# Altium PCB IRBeaconBlasterPCB.PcbDoc
Units mil, origin at the board's own origin, x right, y up, seen from the top; angles counter-clockwise.
Board outline 650 x 2125 mil, 2 copper layers (Top Layer, Bottom Layer); 15 components, 8 nets, 27 pads, 0 vias.
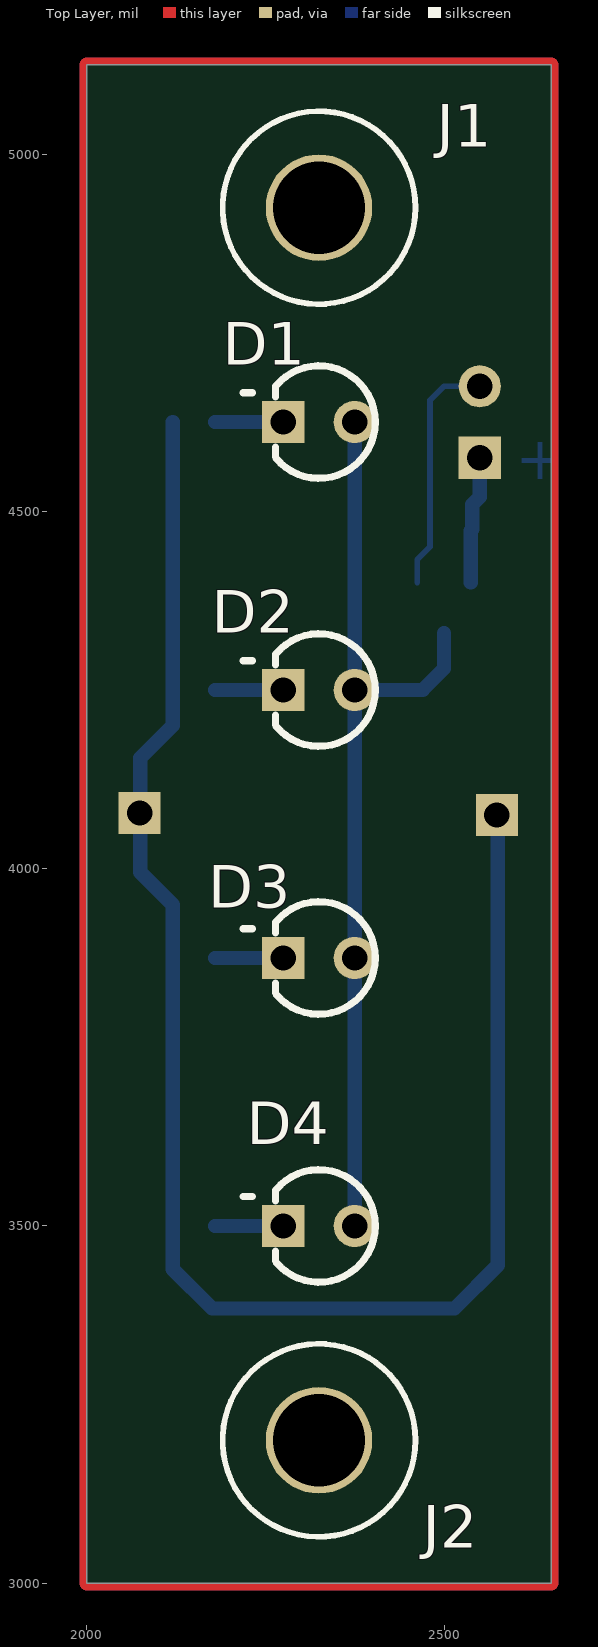
[diagram p0: Top Layer view]
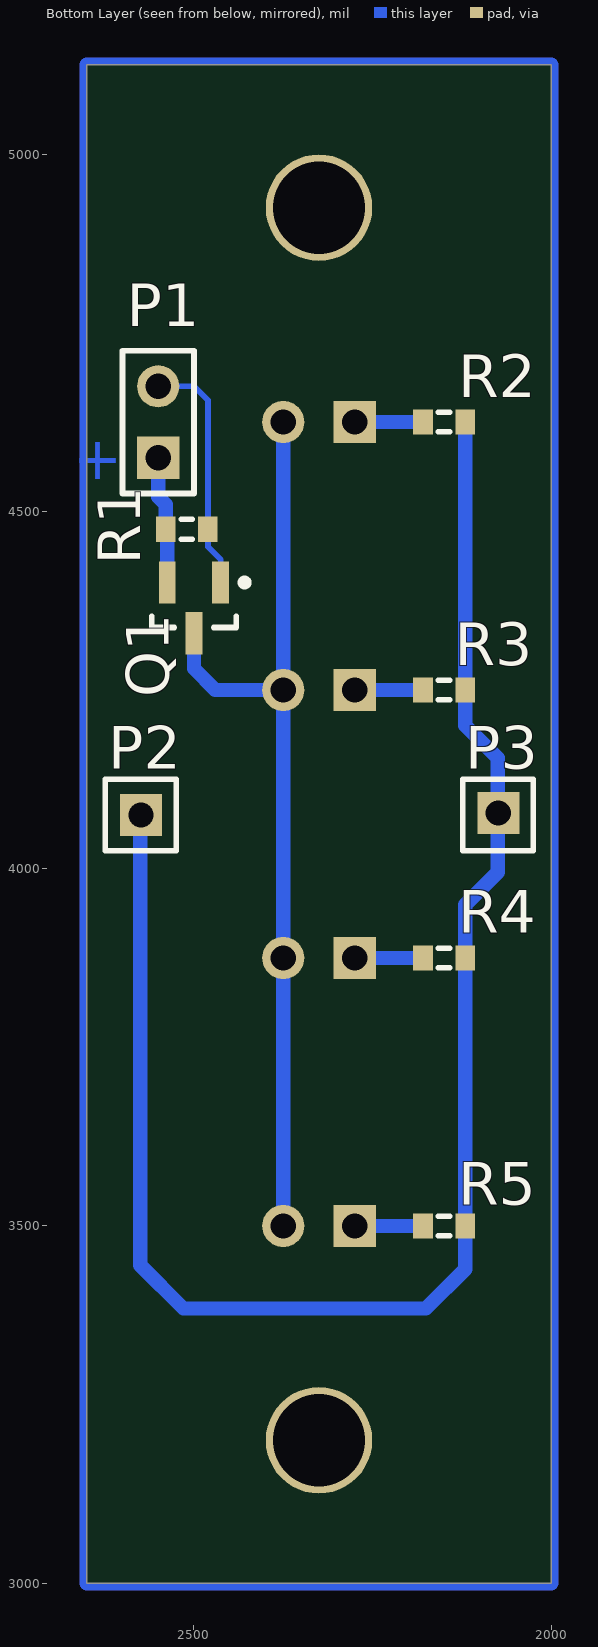
[diagram p1: Bottom Layer view, seen from below]

## Layer stack, top to bottom
Top Layer: signal copper 1.4
Dielectric: dielectric 12.6, FR-4, Dk 4.8
Bottom Layer: signal copper 1.4

## Board outline
2000,3000 2650,3000 2650,5125 2000,5125

## Design rules (kind name [scope] priority, off if disabled: settings)
Clearance [All] p1: gap=8
HoleSize [All] p1: absolutevalues=TRUE maxlimit=200 minlimit=20 maxpercent=80.000 minpercent=20.000
MinimumSolderMaskSliver [All] p1: minsoldermaskwidth=0
PolygonConnect [All] p1: connectstyle=Relief reliefconductorwidth=10 reliefentries=4 polygonreliefangle="90 Angle"
RoutingVias [All] p1: holewidth=20 width=30 viastyle="Through Hole" minholewidth=28 minwidth=50 maxholewidth=28 maxwidth=50
SilkToSilkClearance [All] p1: silktosilkclearance=0
SilkscreenOverComponentPads [All] p1: minsilkscreentomaskgap=-50
SolderMaskExpansion [All] p1: expansion=4
Width [All] p1: maxlimit=50 minlimit=8 preferedwidth=12 minimp=50.000000 maximp=50.000000 favimp=50.000000
24 further rules are at their usual default settings.

## Components (designator, comment, footprint, x,y, rotation, side; value= is the part's Value field where it differs from the comment)
D1 "IR LED" LED_PTH_3mm 2325,4625 r0 top
D2 "IR LED" LED_PTH_3mm 2325,4250 r0 top
D3 "IR LED" LED_PTH_3mm 2325,3875 r0 top
D4 "IR LED" LED_PTH_3mm 2325,3500 r0 top
J1 "#4" #4_Screw_Hole 2325,4925 r0 top
J2 "#4" #4_Screw_Hole 2325,3200 r0 top
P1 "Input_Header" HDR1X2 2550,4575 r90 bottom
P2 "GND_1" HDR1X1#1 2573.98,4075 r180 bottom
P3 "GND_2" HDR1X1#2 2073.98,4075 r180 bottom
Q1 "DMG2301U" SOT-23 2500,4365 r270 bottom
R1 "1K" J1-0603 2510,4475 r0 bottom
R2 "Res3" J1-0603 2150,4625 r0 bottom
R3 "Res3" J1-0603 2150,4250 r0 bottom
R4 "Res3" J1-0603 2150,3875 r0 bottom
R5 "Res3" J1-0603 2150,3500 r0 bottom

## Footprints (in the part's own frame and the unit in brackets; to place one, negate y for a bottom-side part, rotate by r counter-clockwise, add the part's x,y. Pads: shape width x height; smd on the part's side, far side on the other; paste and mask are expansions set on the pad)
#4_Screw_Hole [mil] "#4 Screw Hole, 3.2766mm Hole Dia., Plated"
  round 149 hole 129 unplated: 1(0,0)
  silkscreen extent -135,-135 135,135
HDR1X1#1 [mm] "Way of designating a single hole which is meant to have an electrical connection"
  rect 1.5x1.5 hole 0.9: 1(0,0)
  silkscreen extent -1.27,-1.27 1.24,1.27
HDR1X1#2 [mm] "Way of designating a single hole which is meant to have an electrical connection"
  rect 1.5x1.5 hole 0.9: 1(0,0.076)
  silkscreen extent -1.27,-1.27 1.24,1.27
HDR1X2 [mm] "Connector; Header; 2 Position"
  rect 1.5x1.5 hole 0.9: 1(0,0)
  round 1.5 hole 0.9: 2(2.54,0)
  silkscreen extent -1.27,-1.27 3.81,1.27
J1-0603 [mm] "Chip Resistor, Body 1.6x0.8mm, IPC High Density"
  rect 0.7x0.9 smd: 1(-0.75,0) 2(0.75,0)
  silkscreen extent -0.2,-0.35 0.2,0.35, body extent -0.85,-0.48 0.85,0.48, height 0.9
LED_PTH_3mm [mm] "Pin Though Hole 3mm LED with 0.1 Pitch Leads"
  round 1.5 hole 0.9: 1(1.27,0)
  rect 1.5x1.5 hole 0.9: 2(-1.27,0)
  silkscreen extent -2.69,-2 2,2
SOT-23 [mm] "SOT23, 3-Leads, Body 3.0x2.5mm (max), Pitch 0.95mm, IPC Medium Density"
  rect 1.5x0.6 smd: 1(-0.9,0.95) 2(-0.9,-0.95) 3(0.9,0)
  silkscreen extent -1.02,-1.5 0.7,1.92, body extent -0.7,-1.5 0.7,1.5, height 1.2

## Part data
D1 D2 D3 D4: library part LED
J1 J2: library part Mechanical_Hole, "A mechanical hole for mounting the board"
P1: library part "Header 2", "Header, 2-Pin"
P2 P3: library part "Header 1x1"
Q1: library part P-Mosfet
R1: library part Res3, "Resistor"
R2 R3 R4 R5: "Resistor"

## Nets (pads, with @x,y where several pads share a name; then routed paths per layer and width w, separated by ;. In a path a pad name is that pad's centre, name@x,y a point inside that pad or via, vN(x,y) a via of type N, cw(c..) or ccw(c..) an arc to the next point about the centre after c; other vN are vias at no path point)
GND: P2.1 P3.1 R2.1 R3.1 R4.1 R5.1 | length 2355.5
  Bottom Layer w20: R2.1 R3.1 2120.47,4200.47 2075,4155 2075,4078 2075,3995 2120.47,3949.53 R4.1 R5.1 2120.47,3439.53 2175.47,3384.53 2514.53,3384.53 2575,3445 P2.1@2575,4075
NetD1_1: D1.1 D2.1 D3.1 D4.1 Q1.3 | length 1312
  Bottom Layer w20: D4.1 D3.1 D2.1 ; D1.1 D2.1 ; Q1.3 2500,4280 2470,4250 D2.1
NetD1_2: D1.2 R2.2 | length 95.5
  Bottom Layer w20: R2.2 D1.2
NetD2_2: D2.2 R3.2 | length 95.5
  Bottom Layer w20: R3.2 D2.2
NetD3_2: D3.2 R4.2 | length 95.5
  Bottom Layer w20: R4.2 D3.2
NetD4_2: D4.2 R5.2 | length 95.5
  Bottom Layer w20: R5.2 D4.2
NetP1_2: P1.2 Q1.1 R1.1 | length 340.1
  Bottom Layer w8: Q1.1 2462.6,4432.6 2480.47,4450.47 R1.1 2480.47,4655.47 2500,4675 P1.2
VCC: P1.1 Q1.2 R1.2 | length 184.8
  Bottom Layer w20: Q1.2 2537.4,4472.87 R1.2 2539.53,4509.53 2550,4520 P1.1 P1.1@2550,4580
pads on no net: J1.1 J2.1
copper on no net: | length 11225.7
  Top Layer w10: 1995,3000 ccw(c2000,3000) 2000,2995 ; 1995,3000 ccw(c2000,3000) 2000,2995 ; 1995,3000 1995,5125 ; 1995,5125 cw(c2000,5125) 2000,5130 ; 1995,5125 cw(c2000,5125) 2000,5130 ; 2000,2995 2650,2995 ; 2000,5130 2650,5130 ; 2650,2995 ccw(c2650,3000) 2655,3000 ; 2650,2995 ccw(c2650,3000) 2655,3000 ; 2650,5130 cw(c2650,5125) 2655,5125 ; 2650,5130 cw(c2650,5125) 2655,5125 ; 2655,3000 2655,5125
  Bottom Layer w10: 1995,3000 ccw(c2000,3000) 2000,2995 ; 1995,3000 ccw(c2000,3000) 2000,2995 ; 1995,3000 1995,5125 ; 1995,5125 cw(c2000,5125) 2000,5130 ; 1995,5125 cw(c2000,5125) 2000,5130 ; 2000,2995 2650,2995 ; 2000,5130 2650,5130 ; 2650,2995 ccw(c2650,3000) 2655,3000 ; 2650,2995 ccw(c2650,3000) 2655,3000 ; 2650,5130 cw(c2650,5125) 2655,5125 ; 2650,5130 cw(c2650,5125) 2655,5125 ; 2655,3000 2655,5125

## Other copper
Bottom Layer:
  text "+" at 2600,4545 h60

## Silkscreen, mask and mechanical layers (free items; w line width, h text height)
Top Solder:
  lines w10: 1995,3000 ccw(c2000,3000) 2000,2995 ; 1995,3000 ccw(c2000,3000) 2000,2995 ; 1995,3000 1995,5125 ; 1995,5125 cw(c2000,5125) 2000,5130 ; 1995,5125 cw(c2000,5125) 2000,5130 ; 2000,2995 2650,2995 ; 2000,5130 2650,5130 ; 2650,2995 ccw(c2650,3000) 2655,3000 ; 2650,2995 ccw(c2650,3000) 2655,3000 ; 2650,5130 cw(c2650,5125) 2655,5125 ; 2650,5130 cw(c2650,5125) 2655,5125 ; 2655,3000 2655,5125
Bottom Solder:
  lines w10: 1995,3000 ccw(c2000,3000) 2000,2995 ; 1995,3000 ccw(c2000,3000) 2000,2995 ; 1995,3000 1995,5125 ; 1995,5125 cw(c2000,5125) 2000,5130 ; 1995,5125 cw(c2000,5125) 2000,5130 ; 2000,2995 2650,2995 ; 2000,5130 2650,5130 ; 2650,2995 ccw(c2650,3000) 2655,3000 ; 2650,2995 ccw(c2650,3000) 2655,3000 ; 2650,5130 cw(c2650,5125) 2655,5125 ; 2650,5130 cw(c2650,5125) 2655,5125 ; 2655,3000 2655,5125